# Altium PCB LED.PcbDoc
Units mil, origin at the board's own origin, x right, y up, seen from the top; angles counter-clockwise.
Board outline 401.6 x 559.09 mil, 2 copper layers (Top Layer, Bottom Layer); 3 components, 3 nets, 11 pads, 0 vias.
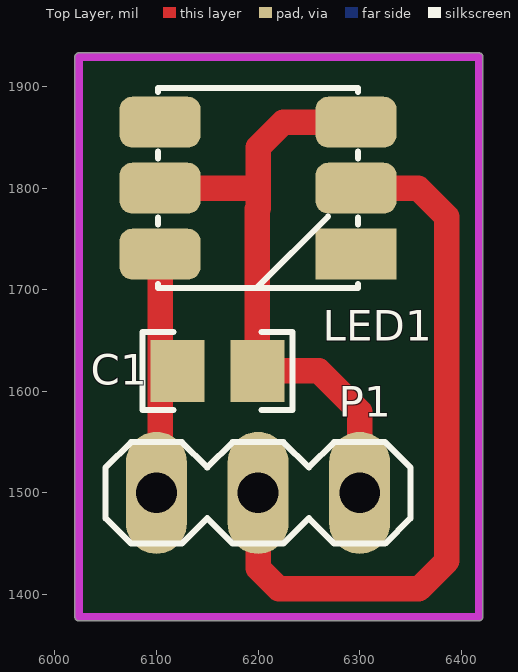
[diagram p0: Top Layer view]
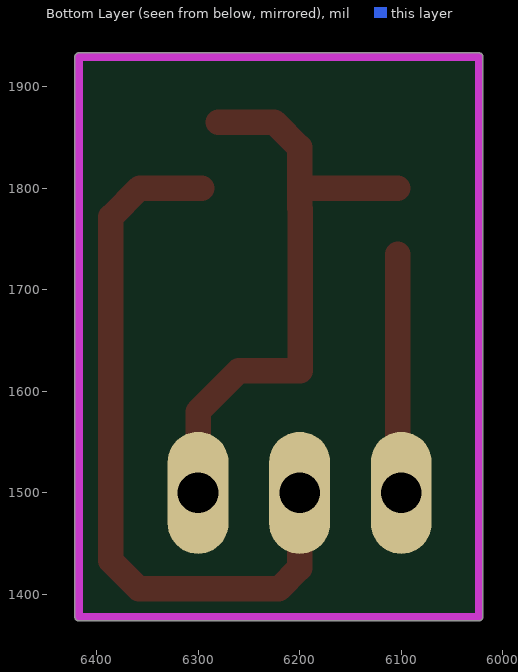
[diagram p1: Bottom Layer view, seen from below]

## Layer stack, top to bottom
Top Layer: signal copper 1.4
Dielectric: dielectric 12.6, FR-4, Dk 4.8
Bottom Layer: signal copper 1.4

## Board outline
6019.67,1377.95 ccw(c6023.62,1377.95) 6023.62,1374 6417.32,1374 ccw(c6417.32,1377.95) 6421.27,1377.95 6421.27,1929.13 ccw(c6417.32,1929.13) 6417.32,1933.09 6023.62,1933.09 ccw(c6023.62,1929.13) 6019.67,1929.13

## Design rules (kind name [scope] priority, off if disabled: settings)
Clearance [All] p1: gap=10
PolygonConnect [All] p1: connectstyle=Relief reliefconductorwidth=10 reliefentries=4 polygonreliefangle="90 Angle" airgapwidth=10
RoutingVias [All] p1: holewidth=28 width=50 viastyle="Through Hole" minholewidth=28 minwidth=50 maxholewidth=28 maxwidth=50
SolderMaskExpansion [All] p1: expansion=4
Width [All] p1: maxlimit=25 minlimit=25 preferedwidth=25 minimp=50.000000 maximp=50.000000 favimp=50.000000
28 further rules are at their usual default settings.

## Components (designator, comment, footprint, x,y, rotation, side; value= is the part's Value field where it differs from the comment)
C1 "100nF" C0805 6160,1620 r180 top
LED1 "WS2812S" WS2812 6200,1800 r0 top
P1 "Header 3" MA03-1L 6200,1500 r180 top

## Footprints (in the part's own frame and the unit in brackets; to place one, negate y for a bottom-side part, rotate by r counter-clockwise, add the part's x,y. Pads: shape width x height; smd on the part's side, far side on the other; paste and mask are expansions set on the pad)
C0805 [mm] "Chip Capacitor, Body 2.0x1.2mm, Height 1.3mm, IPC Low Density"
  rect 1.35x1.55 smd: 1(-1,0) 2(1,0)
  silkscreen extent -1.88,-0.97 1.88,0.97, body extent -1.1,-0.72 1.1,0.72, height 1.3
MA03-1L [mil]
  oval 60x120 hole 40: 1(-100,0) 2(0,0) 3(100,0)
  silkscreen extent -150,-50 150,50, body extent -150,-50 150,50, height 339
WS2812 [mm]
  rect 2.032x1.27 smd: 1(2.45,-1.65)
  rrect50% 2.032x1.27 smd: 2(2.45,0) 3(2.45,1.65) 4(-2.45,1.65) 5(-2.45,0) 6(-2.45,-1.65)
  silkscreen extent -2.5,-2.5 2.5,2.5, body extent -2.58,-2.5 2.58,2.5, height 1.7

## Part data
C1: library part Cap, "Capacitor"
LED1: library part WS2812
P1: "Header, 3-Pin"

## Nets (pads, with @x,y where several pads share a name; then routed paths per layer and width w, separated by ;. In a path a pad name is that pad's centre, name@x,y a point inside that pad or via, vN(x,y) a via of type N, cw(c..) or ccw(c..) an arc to the next point about the centre after c; other vN are vias at no path point)
5V: C1.1 LED1.3 LED1.5 P1.1 | length 604.3
  Top Layer w25: LED1.5 6200,1800 ; LED1.3@6280,1864.96 6224.96,1864.96 6200,1840 6200,1800 ; P1.1 6300,1580 6260,1620 C1.1 6199.37,1779.37 6200,1780 6200,1800
GND: C1.2 LED1.6 P1.3 | length 186.5
  Top Layer w25: P1.3@6100,1550 6103.54,1553.54 6103.54,1620 LED1.6
LED: LED1.2 P1.2 | length 719.4
  Top Layer w25: P1.2 6200,1425.98 6220.47,1405.51 6358.27,1405.51 6385.83,1433.07 6385.83,1771.65 6357.48,1800 LED1.2
pads on no net: LED1.1 LED1.4

## Keep-outs
Keep-Out Layer:
  lines w7.87: 6023.62,1377.95 6417.32,1377.95 6417.32,1929.13 6023.62,1929.13 6023.62,1377.95

## Dimensions
6417.32,1377.95 to 6417.32,1929.13 on Keep-Out Layer
6023.62,1374 to 6417.32,1377.95 on Keep-Out Layer